# Altium PCB PCB1.PcbDoc (part 2 of 2)
Units mil, origin at the board's own origin, x right, y up, seen from the top; angles counter-clockwise.
Board outline 1945 x 1820 mil, 2 copper layers (Top Layer, Bottom Layer); 144 components, 11 nets, 468 pads, 0 vias.
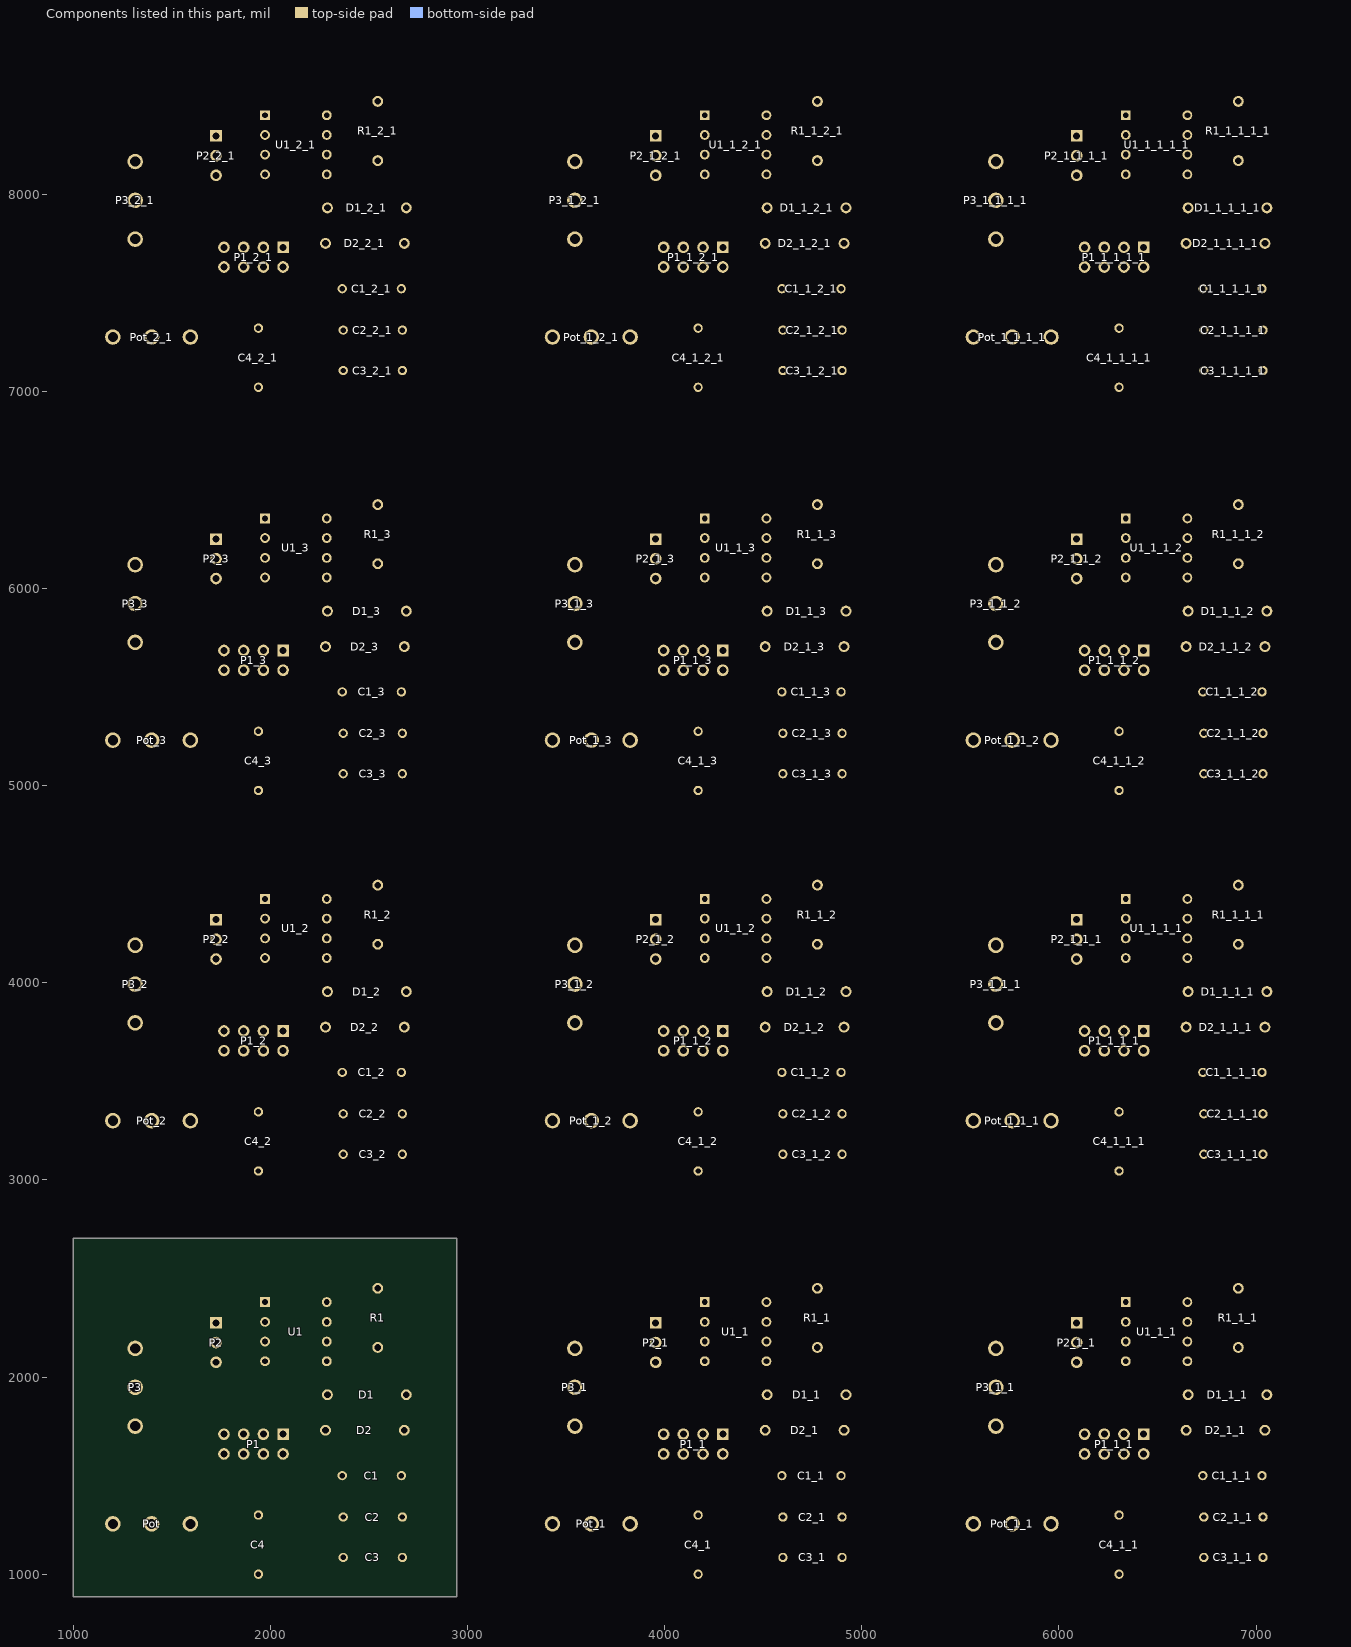
[diagram p2: the components of this part, seen from the top]

## Nets (pads, with @x,y where several pads share a name; then routed paths per layer and width w, separated by ;. In a path a pad name is that pad's centre, name@x,y a point inside that pad or via, vN(x,y) a via of type N, cw(c..) or ccw(c..) an arc to the next point about the centre after c; other vN are vias at no path point) (continued)
copper on no net: | length 190773.3
  Bottom Layer w45: 1201.3,3300 1194.84,3306.46 1148.54,3306.46 1100,3355 1100,3903.15 1190,3993.15 1315,3993.15 1536.85,4215 1540,4215 1545,4220 1725,4220 1967.37,4220 1972.37,4225 1973.7,4225 ; 1201.3,5230 1194.84,5236.46 1148.54,5236.46 1100,5285 1100,5833.15 1190,5923.15 1315,5923.15 1536.85,6145 1540,6145 1545,6150 1725,6150 1967.37,6150 1972.37,6155 1973.7,6155 ; 1201.3,7275 1194.84,7281.46 1148.54,7281.46 1100,7330 1100,7878.15 1190,7968.15 1315,7968.15 1536.85,8190 1540,8190 1545,8195 1725,8195 1967.37,8195 1972.37,8200 1973.7,8200 ; 1315,3796.3 1636.01,4117.31 1722.31,4117.31 1725,4120 1967.37,4120 1972.37,4125 1973.7,4125 2042.25,4125 2165,4247.75 2165,4380 2209.06,4424.06 2285.36,4424.06 2286.3,4425 2287.24,4425.94 2380.94,4425.94 2450,4495 2545,4495 ; 1315,4190 1445,4320 1725,4320 1830,4425 1973.7,4425 1973.7,4605.06 2053.64,4685 2640,4685 2800,4525 2800,3095 2683.88,2978.88 1846.36,2978.88 1775,3050.24 1775,3370 1692.97,3452.03 1692.97,3684.83 1763.14,3755 1765,3755 1865,3755 1965,3755 2065,3755 ; 1315,5726.3 1636.01,6047.31 1722.31,6047.31 1725,6050 1967.37,6050 1972.37,6055 1973.7,6055 2042.25,6055 2165,6177.75 2165,6310 2209.06,6354.06 2285.36,6354.06 2286.3,6355 2287.24,6355.94 2380.94,6355.94 2450,6425 2545,6425 ; 1315,6120 1445,6250 1725,6250 1830,6355 1973.7,6355 1973.7,6535.06 2053.64,6615 2640,6615 2800,6455 2800,5025 2683.88,4908.88 1846.36,4908.88 1775,4980.24 1775,5300 1692.97,5382.03 1692.97,5614.83 1763.14,5685 1765,5685 1865,5685 1965,5685 2065,5685 ; 1315,7771.3 1636.01,8092.31 1722.31,8092.31 1725,8095 1967.37,8095 1972.37,8100 1973.7,8100 2042.25,8100 2165,8222.75 2165,8355 2209.06,8399.06 2285.36,8399.06 2286.3,8400 2287.24,8400.94 2380.94,8400.94 2450,8470 2545,8470 ; 1315,8165 1445,8295 1725,8295 1830,8400 1973.7,8400 1973.7,8580.06 2053.64,8660 2640,8660 2800,8500 2800,7070 2683.88,6953.88 1846.36,6953.88 1775,7025.24 1775,7345 1692.97,7427.03 1692.97,7659.83 1763.14,7730 1765,7730 1865,7730 1965,7730 2065,7730 ; 1398.15,3300 1398.15,3668.15 1685,3955 2290,3955 ; 1398.15,5230 1398.15,5598.15 1685,5885 2290,5885 ; 1398.15,7275 1398.15,7643.15 1685,7930 2290,7930 ; 1590,3300 1590,3730 1725,3865 2190,3865 2280,3775 ; 1590,5230 1590,5660 1725,5795 2190,5795 2280,5705 ; 1590,7275 1590,7705 1725,7840 2190,7840 2280,7750 ; 1765,3655 1765,3570 1940,3395 1940,3345 ; 1765,5585 1765,5500 1940,5325 1940,5275 ; 1765,7630 1765,7545 1940,7370 1940,7320 ; 1865,3655 1867.69,3652.31 1867.69,3577.31 2315,3130 2370,3130 ; 1865,5585 1867.69,5582.31 1867.69,5507.31 2315,5060 2370,5060 ; 1865,7630 1867.69,7627.31 1867.69,7552.31 2315,7105 2370,7105 ; 1940,3045 1950,3055 2615,3055 2670,3110 2670,3130 2670,3335 2670,3539.39 2665,3544.39 2665,3545 2665,3930 2688.06,3953.06 ; 1940,4975 1950,4985 2615,4985 2670,5040 2670,5060 2670,5265 2670,5469.39 2665,5474.39 2665,5475 2665,5860 2688.06,5883.06 ; 1940,7020 1950,7030 2615,7030 2670,7085 2670,7105 2670,7310 2670,7514.39 2665,7519.39 2665,7520 2665,7905 2688.06,7928.06 ; 1965,3655 1965,3605 2234.57,3335.43 2369.57,3335.43 2370,3335 ; 1965,5585 1965,5535 2234.57,5265.43 2369.57,5265.43 2370,5265 ; 1965,7630 1965,7580 2234.57,7310.43 2369.57,7310.43 2370,7310 ; 1973.7,4325 1974.64,4325.94 2053.64,4325.94 2080,4352.3 2080,4470 2205,4595 2615,4595 2690,4520 2690,3955 2688.06,3953.06 ; 1973.7,6255 1974.64,6255.94 2053.64,6255.94 2080,6282.3 2080,6400 2205,6525 2615,6525 2690,6450 2690,5885 2688.06,5883.06 ; 1973.7,8300 1974.64,8300.94 2053.64,8300.94 2080,8327.3 2080,8445 2205,8570 2615,8570 2690,8495 2690,7930 2688.06,7928.06 ; 2065,3655 2065,3635 2155,3545 2365,3545 ; 2065,5585 2065,5565 2155,5475 2365,5475 ; 2065,7630 2065,7610 2155,7520 2365,7520 ; 2286.3,4225 2287.24,4224.06 2370.94,4224.06 2645,3950 2648.06,3953.06 2688.06,3953.06 ; 2286.3,4325 2287.24,4325.94 2414.06,4325.94 2545,4195 ; 2286.3,6155 2287.24,6154.06 2370.94,6154.06 2645,5880 2648.06,5883.06 2688.06,5883.06 ; 2286.3,6255 2287.24,6255.94 2414.06,6255.94 2545,6125 ; 2286.3,8200 2287.24,8199.06 2370.94,8199.06 2645,7925 2648.06,7928.06 2688.06,7928.06 ; 2286.3,8300 2287.24,8300.94 2414.06,8300.94 2545,8170 ; 3431.3,1255 3424.84,1261.46 3378.54,1261.46 3330,1310 3330,1858.15 3420,1948.15 3545,1948.15 3766.85,2170 3770,2170 3775,2175 3955,2175 4197.37,2175 4202.37,2180 4203.7,2180 ; 3431.3,3300 3424.84,3306.46 3378.54,3306.46 3330,3355 3330,3903.15 3420,3993.15 3545,3993.15 3766.85,4215 3770,4215 3775,4220 3955,4220 4197.37,4220 4202.37,4225 4203.7,4225 ; 3431.3,5230 3424.84,5236.46 3378.54,5236.46 3330,5285 3330,5833.15 3420,5923.15 3545,5923.15 3766.85,6145 3770,6145 3775,6150 3955,6150 4197.37,6150 4202.37,6155 4203.7,6155 ; 3431.3,7275 3424.84,7281.46 3378.54,7281.46 3330,7330 3330,7878.15 3420,7968.15 3545,7968.15 3766.85,8190 3770,8190 3775,8195 3955,8195 4197.37,8195 4202.37,8200 4203.7,8200 ; 3545,1751.3 3866.01,2072.31 3952.31,2072.31 3955,2075 4197.37,2075 4202.37,2080 4203.7,2080 4272.25,2080 4395,2202.75 4395,2335 4439.06,2379.06 4515.36,2379.06 4516.3,2380 4517.24,2380.94 4610.94,2380.94 4680,2450 4775,2450 ; 3545,2145 3675,2275 3955,2275 4060,2380 4203.7,2380 4203.7,2560.06 4283.64,2640 4870,2640 5030,2480 5030,1050 4913.88,933.88 4076.36,933.88 4005,1005.24 4005,1325 3922.97,1407.03 3922.97,1639.83 3993.14,1710 3995,1710 4095,1710 4195,1710 4295,1710 ; 3545,3796.3 3866.01,4117.31 3952.31,4117.31 3955,4120 4197.37,4120 4202.37,4125 4203.7,4125 4272.25,4125 4395,4247.75 4395,4380 4439.06,4424.06 4515.36,4424.06 4516.3,4425 4517.24,4425.94 4610.94,4425.94 4680,4495 4775,4495 ; 3545,4190 3675,4320 3955,4320 4060,4425 4203.7,4425 4203.7,4605.06 4283.64,4685 4870,4685 5030,4525 5030,3095 4913.88,2978.88 4076.36,2978.88 4005,3050.24 4005,3370 3922.97,3452.03 3922.97,3684.83 3993.14,3755 3995,3755 4095,3755 4195,3755 4295,3755 ; 3545,5726.3 3866.01,6047.31 3952.31,6047.31 3955,6050 4197.37,6050 4202.37,6055 4203.7,6055 4272.25,6055 4395,6177.75 4395,6310 4439.06,6354.06 4515.36,6354.06 4516.3,6355 4517.24,6355.94 4610.94,6355.94 4680,6425 4775,6425 ; 3545,6120 3675,6250 3955,6250 4060,6355 4203.7,6355 4203.7,6535.06 4283.64,6615 4870,6615 5030,6455 5030,5025 4913.88,4908.88 4076.36,4908.88 4005,4980.24 4005,5300 3922.97,5382.03 3922.97,5614.83 3993.14,5685 3995,5685 4095,5685 4195,5685 4295,5685 ; 3545,7771.3 3866.01,8092.31 3952.31,8092.31 3955,8095 4197.37,8095 4202.37,8100 4203.7,8100 4272.25,8100 4395,8222.75 4395,8355 4439.06,8399.06 4515.36,8399.06 4516.3,8400 4517.24,8400.94 4610.94,8400.94 4680,8470 4775,8470 ; 3545,8165 3675,8295 3955,8295 4060,8400 4203.7,8400 4203.7,8580.06 4283.64,8660 4870,8660 5030,8500 5030,7070 4913.88,6953.88 4076.36,6953.88 4005,7025.24 4005,7345 3922.97,7427.03 3922.97,7659.83 3993.14,7730 3995,7730 4095,7730 4195,7730 4295,7730 ; 3628.15,1255 3628.15,1623.15 3915,1910 4520,1910 ; 3628.15,3300 3628.15,3668.15 3915,3955 4520,3955 ; 3628.15,5230 3628.15,5598.15 3915,5885 4520,5885 ; 3628.15,7275 3628.15,7643.15 3915,7930 4520,7930 ; 3820,1255 3820,1685 3955,1820 4420,1820 4510,1730 ; 3820,3300 3820,3730 3955,3865 4420,3865 4510,3775 ; 3820,5230 3820,5660 3955,5795 4420,5795 4510,5705 ; 3820,7275 3820,7705 3955,7840 4420,7840 4510,7750 ; 3995,1610 3995,1525 4170,1350 4170,1300 ; 3995,3655 3995,3570 4170,3395 4170,3345 ; 3995,5585 3995,5500 4170,5325 4170,5275 ; 3995,7630 3995,7545 4170,7370 4170,7320 ; 4095,1610 4097.69,1607.31 4097.69,1532.31 4545,1085 4600,1085 ; 4095,3655 4097.69,3652.31 4097.69,3577.31 4545,3130 4600,3130 ; 4095,5585 4097.69,5582.31 4097.69,5507.31 4545,5060 4600,5060 ; 4095,7630 4097.69,7627.31 4097.69,7552.31 4545,7105 4600,7105 ; 4170,1000 4180,1010 4845,1010 4900,1065 4900,1085 4900,1290 4900,1494.39 4895,1499.39 4895,1500 4895,1885 4918.06,1908.06 ; 4170,3045 4180,3055 4845,3055 4900,3110 4900,3130 4900,3335 4900,3539.39 4895,3544.39 4895,3545 4895,3930 4918.06,3953.06 ; 4170,4975 4180,4985 4845,4985 4900,5040 4900,5060 4900,5265 4900,5469.39 4895,5474.39 4895,5475 4895,5860 4918.06,5883.06 ; 4170,7020 4180,7030 4845,7030 4900,7085 4900,7105 4900,7310 4900,7514.39 4895,7519.39 4895,7520 4895,7905 4918.06,7928.06 ; 4195,1610 4195,1560 4464.57,1290.43 4599.57,1290.43 4600,1290 ; 4195,3655 4195,3605 4464.57,3335.43 4599.57,3335.43 4600,3335 ; 4195,5585 4195,5535 4464.57,5265.43 4599.57,5265.43 4600,5265 ; 4195,7630 4195,7580 4464.57,7310.43 4599.57,7310.43 4600,7310 ; 4203.7,2280 4204.64,2280.94 4283.64,2280.94 4310,2307.3 4310,2425 4435,2550 4845,2550 4920,2475 4920,1910 4918.06,1908.06 ; 4203.7,4325 4204.64,4325.94 4283.64,4325.94 4310,4352.3 4310,4470 4435,4595 4845,4595 4920,4520 4920,3955 4918.06,3953.06 ; 4203.7,6255 4204.64,6255.94 4283.64,6255.94 4310,6282.3 4310,6400 4435,6525 4845,6525 4920,6450 4920,5885 4918.06,5883.06 ; 4203.7,8300 4204.64,8300.94 4283.64,8300.94 4310,8327.3 4310,8445 4435,8570 4845,8570 4920,8495 4920,7930 4918.06,7928.06 ; 4295,1610 4295,1590 4385,1500 4595,1500 ; 4295,3655 4295,3635 4385,3545 4595,3545 ; 4295,5585 4295,5565 4385,5475 4595,5475 ; 4295,7630 4295,7610 4385,7520 4595,7520 ; 4516.3,2180 4517.24,2179.06 4600.94,2179.06 4875,1905 4878.06,1908.06 4918.06,1908.06 ; 4516.3,2280 4517.24,2280.94 4644.06,2280.94 4775,2150 ; 4516.3,4225 4517.24,4224.06 4600.94,4224.06 4875,3950 4878.06,3953.06 4918.06,3953.06 ; 4516.3,4325 4517.24,4325.94 4644.06,4325.94 4775,4195 ; 4516.3,6155 4517.24,6154.06 4600.94,6154.06 4875,5880 4878.06,5883.06 4918.06,5883.06 ; 4516.3,6255 4517.24,6255.94 4644.06,6255.94 4775,6125 ; 4516.3,8200 4517.24,8199.06 4600.94,8199.06 4875,7925 4878.06,7928.06 4918.06,7928.06 ; 4516.3,8300 4517.24,8300.94 4644.06,8300.94 4775,8170 ; 5566.3,1255 5559.84,1261.46 5513.54,1261.46 5465,1310 5465,1858.15 5555,1948.15 5680,1948.15 5901.85,2170 5905,2170 5910,2175 6090,2175 6332.37,2175 6337.37,2180 6338.7,2180 ; 5566.3,3300 5559.84,3306.46 5513.54,3306.46 5465,3355 5465,3903.15 5555,3993.15 5680,3993.15 5901.85,4215 5905,4215 5910,4220 6090,4220 6332.37,4220 6337.37,4225 6338.7,4225 ; 5566.3,5230 5559.84,5236.46 5513.54,5236.46 5465,5285 5465,5833.15 5555,5923.15 5680,5923.15 5901.85,6145 5905,6145 5910,6150 6090,6150 6332.37,6150 6337.37,6155 6338.7,6155 ; 5566.3,7275 5559.84,7281.46 5513.54,7281.46 5465,7330 5465,7878.15 5555,7968.15 5680,7968.15 5901.85,8190 5905,8190 5910,8195 6090,8195 6332.37,8195 6337.37,8200 6338.7,8200 ; 5680,1751.3 6001.01,2072.31 6087.31,2072.31 6090,2075 6332.37,2075 6337.37,2080 6338.7,2080 6407.25,2080 6530,2202.75 6530,2335 6574.06,2379.06 6650.36,2379.06 6651.3,2380 6652.24,2380.94 6745.94,2380.94 6815,2450 6910,2450 ; 5680,2145 5810,2275 6090,2275 6195,2380 6338.7,2380 6338.7,2560.06 6418.64,2640 7005,2640 7165,2480 7165,1050 7048.88,933.88 6211.36,933.88 6140,1005.24 6140,1325 6057.97,1407.03 6057.97,1639.83 6128.14,1710 6130,1710 6230,1710 6330,1710 6430,1710 ; 5680,3796.3 6001.01,4117.31 6087.31,4117.31 6090,4120 6332.37,4120 6337.37,4125 6338.7,4125 6407.25,4125 6530,4247.75 6530,4380 6574.06,4424.06 6650.36,4424.06 6651.3,4425 6652.24,4425.94 6745.94,4425.94 6815,4495 6910,4495 ; 5680,4190 5810,4320 6090,4320 6195,4425 6338.7,4425 6338.7,4605.06 6418.64,4685 7005,4685 7165,4525 7165,3095 7048.88,2978.88 6211.36,2978.88 6140,3050.24 6140,3370 6057.97,3452.03 6057.97,3684.83 6128.14,3755 6130,3755 6230,3755 6330,3755 6430,3755 ; 5680,5726.3 6001.01,6047.31 6087.31,6047.31 6090,6050 6332.37,6050 6337.37,6055 6338.7,6055 6407.25,6055 6530,6177.75 6530,6310 6574.06,6354.06 6650.36,6354.06 6651.3,6355 6652.24,6355.94 6745.94,6355.94 6815,6425 6910,6425 ; 5680,6120 5810,6250 6090,6250 6195,6355 6338.7,6355 6338.7,6535.06 6418.64,6615 7005,6615 7165,6455 7165,5025 7048.88,4908.88 6211.36,4908.88 6140,4980.24 6140,5300 6057.97,5382.03 6057.97,5614.83 6128.14,5685 6130,5685 6230,5685 6330,5685 6430,5685 ; 5680,7771.3 6001.01,8092.31 6087.31,8092.31 6090,8095 6332.37,8095 6337.37,8100 6338.7,8100 6407.25,8100 6530,8222.75 6530,8355 6574.06,8399.06 6650.36,8399.06 6651.3,8400 6652.24,8400.94 6745.94,8400.94 6815,8470 6910,8470 ; 5680,8165 5810,8295 6090,8295 6195,8400 6338.7,8400 6338.7,8580.06 6418.64,8660 7005,8660 7165,8500 7165,7070 7048.88,6953.88 6211.36,6953.88 6140,7025.24 6140,7345 6057.97,7427.03 6057.97,7659.83 6128.14,7730 6130,7730 6230,7730 6330,7730 6430,7730 ; 5763.15,1255 5763.15,1623.15 6050,1910 6655,1910 ; 5763.15,3300 5763.15,3668.15 6050,3955 6655,3955 ; 5763.15,5230 5763.15,5598.15 6050,5885 6655,5885 ; 5763.15,7275 5763.15,7643.15 6050,7930 6655,7930 ; 5955,1255 5955,1685 6090,1820 6555,1820 6645,1730 ; 5955,3300 5955,3730 6090,3865 6555,3865 6645,3775 ; 5955,5230 5955,5660 6090,5795 6555,5795 6645,5705 ; 5955,7275 5955,7705 6090,7840 6555,7840 6645,7750 ; 6130,1610 6130,1525 6305,1350 6305,1300 ; 6130,3655 6130,3570 6305,3395 6305,3345 ; 6130,5585 6130,5500 6305,5325 6305,5275 ; 6130,7630 6130,7545 6305,7370 6305,7320 ; 6230,1610 6232.69,1607.31 6232.69,1532.31 6680,1085 6735,1085 ; 6230,3655 6232.69,3652.31 6232.69,3577.31 6680,3130 6735,3130 ; 6230,5585 6232.69,5582.31 6232.69,5507.31 6680,5060 6735,5060 ; 6230,7630 6232.69,7627.31 6232.69,7552.31 6680,7105 6735,7105 ; 6305,1000 6315,1010 6980,1010 7035,1065 7035,1085 7035,1290 7035,1494.39 7030,1499.39 7030,1500 7030,1885 7053.06,1908.06 ; 6305,3045 6315,3055 6980,3055 7035,3110 7035,3130 7035,3335 7035,3539.39 7030,3544.39 7030,3545 7030,3930 7053.06,3953.06 ; 6305,4975 6315,4985 6980,4985 7035,5040 7035,5060 7035,5265 7035,5469.39 7030,5474.39 7030,5475 7030,5860 7053.06,5883.06 ; 6305,7020 6315,7030 6980,7030 7035,7085 7035,7105 7035,7310 7035,7514.39 7030,7519.39 7030,7520 7030,7905 7053.06,7928.06 ; 6330,1610 6330,1560 6599.57,1290.43 6734.57,1290.43 6735,1290 ; 6330,3655 6330,3605 6599.57,3335.43 6734.57,3335.43 6735,3335 ; 6330,5585 6330,5535 6599.57,5265.43 6734.57,5265.43 6735,5265 ; 6330,7630 6330,7580 6599.57,7310.43 6734.57,7310.43 6735,7310 ; 6338.7,2280 6339.64,2280.94 6418.64,2280.94 6445,2307.3 6445,2425 6570,2550 6980,2550 7055,2475 7055,1910 7053.06,1908.06 ; 6338.7,4325 6339.64,4325.94 6418.64,4325.94 6445,4352.3 6445,4470 6570,4595 6980,4595 7055,4520 7055,3955 7053.06,3953.06 ; 6338.7,6255 6339.64,6255.94 6418.64,6255.94 6445,6282.3 6445,6400 6570,6525 6980,6525 7055,6450 7055,5885 7053.06,5883.06 ; 6338.7,8300 6339.64,8300.94 6418.64,8300.94 6445,8327.3 6445,8445 6570,8570 6980,8570 7055,8495 7055,7930 7053.06,7928.06 ; 6430,1610 6430,1590 6520,1500 6730,1500 ; 6430,3655 6430,3635 6520,3545 6730,3545 ; 6430,5585 6430,5565 6520,5475 6730,5475 ; 6430,7630 6430,7610 6520,7520 6730,7520 ; 6651.3,2180 6652.24,2179.06 6735.94,2179.06 7010,1905 7013.06,1908.06 7053.06,1908.06 ; 6651.3,2280 6652.24,2280.94 6779.06,2280.94 6910,2150 ; 6651.3,4225 6652.24,4224.06 6735.94,4224.06 7010,3950 7013.06,3953.06 7053.06,3953.06 ; 6651.3,4325 6652.24,4325.94 6779.06,4325.94 6910,4195 ; 6651.3,6155 6652.24,6154.06 6735.94,6154.06 7010,5880 7013.06,5883.06 7053.06,5883.06 ; 6651.3,6255 6652.24,6255.94 6779.06,6255.94 6910,6125 ; 6651.3,8200 6652.24,8199.06 6735.94,8199.06 7010,7925 7013.06,7928.06 7053.06,7928.06 ; 6651.3,8300 6652.24,8300.94 6779.06,8300.94 6910,8170

## Polygon pours and split planes (outlines as drawn)
no net on Bottom Layer "NONET_L02_P076" (solid, remove dead copper, pour order 76): 2587.48,5953.24 2702.71,5886.35 2697.12,5635.67 2690.77,5626.16
no net on Bottom Layer "NONET_L02_P074" (solid, remove dead copper, pour order 74): 2690,5835 2690,6070 2673.4,6070 2564.2,5960.8
no net on Bottom Layer "NONET_L02_P072" (solid, remove dead copper, pour order 72): 1000,6680 1000,4860 2940,4860 2945,4865 2945,6680
no net on Bottom Layer "NONET_L02_P070" (solid, remove dead copper, pour order 70): 3230,6680 3230,4860 5170,4860 5175,4865 5175,6680
no net on Bottom Layer "NONET_L02_P068" (solid, remove dead copper, pour order 68): 4920,5835 4920,6070 4903.4,6070 4794.2,5960.8
no net on Bottom Layer "NONET_L02_P066" (solid, remove dead copper, pour order 66): 4817.48,5953.24 4932.71,5886.35 4927.12,5635.67 4920.77,5626.16
no net on Bottom Layer "NONET_L02_P064" (solid, remove dead copper, pour order 64): 6952.48,5953.24 7067.71,5886.35 7062.12,5635.67 7055.77,5626.16
no net on Bottom Layer "NONET_L02_P062" (solid, remove dead copper, pour order 62): 7055,5835 7055,6070 7038.4,6070 6929.2,5960.8
no net on Bottom Layer "NONET_L02_P060" (solid, remove dead copper, pour order 60): 5365,6680 5365,4860 7305,4860 7310,4865 7310,6680
no net on Bottom Layer "NONET_L02_P058" (solid, remove dead copper, pour order 58): 5365,8725 5365,6905 7305,6905 7310,6910 7310,8725
no net on Bottom Layer "NONET_L02_P056" (solid, remove dead copper, pour order 56): 7055,7880 7055,8115 7038.4,8115 6929.2,8005.8
no net on Bottom Layer "NONET_L02_P054" (solid, remove dead copper, pour order 54): 6952.48,7998.24 7067.71,7931.35 7062.12,7680.67 7055.77,7671.16
no net on Bottom Layer "NONET_L02_P052" (solid, remove dead copper, pour order 52): 4817.48,7998.24 4932.71,7931.35 4927.12,7680.67 4920.77,7671.16
no net on Bottom Layer "NONET_L02_P050" (solid, remove dead copper, pour order 50): 4920,7880 4920,8115 4903.4,8115 4794.2,8005.8
no net on Bottom Layer "NONET_L02_P048" (solid, remove dead copper, pour order 48): 3230,8725 3230,6905 5170,6905 5175,6910 5175,8725
no net on Bottom Layer "NONET_L02_P046" (solid, remove dead copper, pour order 46): 1000,8725 1000,6905 2940,6905 2945,6910 2945,8725
no net on Bottom Layer "NONET_L02_P044" (solid, remove dead copper, pour order 44): 2690,7880 2690,8115 2673.4,8115 2564.2,8005.8
no net on Bottom Layer "NONET_L02_P042" (solid, remove dead copper, pour order 42): 2587.48,7998.24 2702.71,7931.35 2697.12,7680.67 2690.77,7671.16
no net on Bottom Layer "NONET_L02_P040" (solid, remove dead copper, pour order 40): 2587.48,4023.24 2702.71,3956.35 2697.12,3705.67 2690.77,3696.16
no net on Bottom Layer "NONET_L02_P038" (solid, remove dead copper, pour order 38): 2690,3905 2690,4140 2673.4,4140 2564.2,4030.8
no net on Bottom Layer "NONET_L02_P036" (solid, remove dead copper, pour order 36): 1000,4750 1000,2930 2940,2930 2945,2935 2945,4750
no net on Bottom Layer "NONET_L02_P034" (solid, remove dead copper, pour order 34): 3230,4750 3230,2930 5170,2930 5175,2935 5175,4750
no net on Bottom Layer "NONET_L02_P032" (solid, remove dead copper, pour order 32): 4920,3905 4920,4140 4903.4,4140 4794.2,4030.8
no net on Bottom Layer "NONET_L02_P030" (solid, remove dead copper, pour order 30): 4817.48,4023.24 4932.71,3956.35 4927.12,3705.67 4920.77,3696.16
no net on Bottom Layer "NONET_L02_P028" (solid, remove dead copper, pour order 28): 6952.48,4023.24 7067.71,3956.35 7062.12,3705.67 7055.77,3696.16
no net on Bottom Layer "NONET_L02_P026" (solid, remove dead copper, pour order 26): 7055,3905 7055,4140 7038.4,4140 6929.2,4030.8
no net on Bottom Layer "NONET_L02_P024" (solid, remove dead copper, pour order 24): 5365,4750 5365,2930 7305,2930 7310,2935 7310,4750
no net on Bottom Layer "NONET_L02_P022" (solid, remove dead copper, pour order 22): 5365,2705 5365,885 7305,885 7310,890 7310,2705
no net on Bottom Layer "NONET_L02_P020" (solid, remove dead copper, pour order 20): 7055,1860 7055,2095 7038.4,2095 6929.2,1985.8
no net on Bottom Layer "NONET_L02_P018" (solid, remove dead copper, pour order 18): 6952.48,1978.24 7067.71,1911.35 7062.12,1660.67 7055.77,1651.16
no net on Bottom Layer "NONET_L02_P016" (solid, remove dead copper, pour order 16): 4817.48,1978.24 4932.71,1911.35 4927.12,1660.67 4920.77,1651.16
no net on Bottom Layer "NONET_L02_P014" (solid, remove dead copper, pour order 14): 4920,1860 4920,2095 4903.4,2095 4794.2,1985.8
no net on Bottom Layer "NONET_L02_P012" (solid, remove dead copper, pour order 12): 3230,2705 3230,885 5170,885 5175,890 5175,2705
GND on Bottom Layer "GND_L02_P010" (solid, remove dead copper, pour order 10): 1000,2705 1000,885 2940,885 2945,890 2945,2705
NetC1_2 on Bottom Layer "NETC1_2_L02_P008" (solid, remove dead copper, pour order 8): 2690,1860 2690,2095 2673.4,2095 2564.2,1985.8
NetC1_2 on Bottom Layer "NETC1_2_L02_P006" (solid, remove dead copper, pour order 6): 2587.48,1978.24 2702.71,1911.35 2697.12,1660.67 2690.77,1651.16
no net on Bottom Layer "Bottom Layer-No Net" (solid, pour order 2): 2690,2010

## Keep-outs
Keep-Out Layer:
  lines w10: 1000,885 1000,2705 2945,2705 2945,885 1000,885 ; 1000,2930 2945,2930 2945,4750 1000,4750 1000,2930 ; 1000,4860 2945,4860 2945,6680 1000,6680 1000,4860 ; 1000,6905 1000,8725 2945,8725 2945,6905 1000,6905 ; 3230,885 5175,885 5175,2705 3230,2705 3230,885 ; 3230,2930 3230,4750 5175,4750 5175,2930 3230,2930 ; 3230,4860 3230,6680 5175,6680 5175,4860 3230,4860 ; 3230,6905 5175,6905 5175,8725 3230,8725 3230,6905 ; 5365,885 5365,2705 7310,2705 7310,885 5365,885 ; 5365,2930 7310,2930 7310,4750 5365,4750 5365,2930 ; 5365,4860 7310,4860 7310,6680 5365,6680 5365,4860 ; 5365,6905 5365,8725 7310,8725 7310,6905 5365,6905

## Other copper
Bottom Layer:
  text "Const Freq" at 1850,8595 h60
  text "Const Freq" at 4080,8595 h60
  text "Const Freq" at 6215,8595 h60
  text "V 01" at 1305,8445 h60
  text "V 01" at 3535,8445 h60
  text "V 01" at 5670,8445 h60
  text "Const Freq" at 1850,6550 h60
  text "Const Freq" at 4080,6550 h60
  text "Const Freq" at 6215,6550 h60
  text "V 01" at 1305,6400 h60
  text "V 01" at 3535,6400 h60
  text "V 01" at 5670,6400 h60
  text "Const Freq" at 1850,4620 h60
  text "Const Freq" at 4080,4620 h60
  text "Const Freq" at 6215,4620 h60
  text "V 01" at 1305,4470 h60
  text "V 01" at 3535,4470 h60
  text "V 01" at 5670,4470 h60
  text "Const Freq" at 1850,2575 h60
  text "Const Freq" at 4080,2575 h60
  text "Const Freq" at 6215,2575 h60
  text "V 01" at 1305,2425 h60
  text "V 01" at 3535,2425 h60
  text "V 01" at 5670,2425 h60

## Silkscreen, mask and mechanical layers (free items; w line width, h text height)
Top Overlay:
  text "By Wesley" at 1240,8505 h60
  text "By Wesley" at 3470,8505 h60
  text "By Wesley" at 5605,8505 h60
  text "GND" at 1235,8315 h60
  text "GND" at 3465,8315 h60
  text "GND" at 5600,8315 h60
  text "Out" at 1625,7940 h60
  text "Out" at 3855,7940 h60
  text "Out" at 5990,7940 h60
  text "Vcc" at 1235,7570 h60
  text "Vcc" at 3465,7570 h60
  text "Vcc" at 5600,7570 h60
  text "By Wesley" at 1240,6460 h60
  text "By Wesley" at 3470,6460 h60
  text "By Wesley" at 5605,6460 h60
  text "GND" at 1235,6270 h60
  text "GND" at 3465,6270 h60
  text "GND" at 5600,6270 h60
  text "Out" at 1625,5895 h60
  text "Out" at 3855,5895 h60
  text "Out" at 5990,5895 h60
  text "Vcc" at 1235,5525 h60
  text "Vcc" at 3465,5525 h60
  text "Vcc" at 5600,5525 h60
  text "By Wesley" at 1240,4530 h60
  text "By Wesley" at 3470,4530 h60
  text "By Wesley" at 5605,4530 h60
  text "GND" at 1235,4340 h60
  text "GND" at 3465,4340 h60
  text "GND" at 5600,4340 h60
  text "Out" at 1625,3965 h60
  text "Out" at 3855,3965 h60
  text "Out" at 5990,3965 h60
  text "Vcc" at 1235,3595 h60
  text "Vcc" at 3465,3595 h60
  text "Vcc" at 5600,3595 h60
  text "By Wesley" at 1240,2485 h60
  text "By Wesley" at 3470,2485 h60
  text "By Wesley" at 5605,2485 h60
  text "GND" at 1235,2295 h60
  text "GND" at 3465,2295 h60
  text "GND" at 5600,2295 h60
  text "Out" at 1625,1920 h60
  text "Out" at 3855,1920 h60
  text "Out" at 5990,1920 h60
  text "Vcc" at 1235,1550 h60
  text "Vcc" at 3465,1550 h60
  text "Vcc" at 5600,1550 h60
Mechanical 1:
  circle w10: c2865,4930 r40.31
  circle w10: c2870,6605 r40.31
  circle w10: c1075,6605 r40.31
  circle w10: c1070,4930 r40.31
  circle w10: c3300,4930 r40.31
  circle w10: c3305,6605 r40.31
  circle w10: c5100,6605 r40.31
  circle w10: c5095,4930 r40.31
  circle w10: c7230,4930 r40.31
  circle w10: c7235,6605 r40.31
  circle w10: c5440,6605 r40.31
  circle w10: c5435,4930 r40.31
  circle w10: c5435,6975 r40.31
  circle w10: c5440,8650 r40.31
  circle w10: c7235,8650 r40.31
  circle w10: c7230,6975 r40.31
  circle w10: c5095,6975 r40.31
  circle w10: c5100,8650 r40.31
  circle w10: c3305,8650 r40.31
  circle w10: c3300,6975 r40.31
  circle w10: c1070,6975 r40.31
  circle w10: c1075,8650 r40.31
  circle w10: c2870,8650 r40.31
  circle w10: c2865,6975 r40.31
  circle w10: c2865,3000 r40.31
  circle w10: c2870,4675 r40.31
  circle w10: c1075,4675 r40.31
  circle w10: c1070,3000 r40.31
  circle w10: c3300,3000 r40.31
  circle w10: c3305,4675 r40.31
  circle w10: c5100,4675 r40.31
  circle w10: c5095,3000 r40.31
  circle w10: c7230,3000 r40.31
  circle w10: c7235,4675 r40.31
  circle w10: c5440,4675 r40.31
  circle w10: c5435,3000 r40.31
  circle w10: c5435,955 r40.31
  circle w10: c5440,2630 r40.31
  circle w10: c7235,2630 r40.31
  circle w10: c7230,955 r40.31
  circle w10: c5095,955 r40.31
  circle w10: c5100,2630 r40.31
  circle w10: c3305,2630 r40.31
  circle w10: c3300,955 r40.31
  circle w10: c1070,955 r40.31
  circle w10: c1075,2630 r40.31
  circle w10: c2870,2630 r40.31
  circle w10: c2865,955 r40.31

## Dimensions
1000,885 to 1000,2705 on Mechanical 1
1000,885 to 2945,885 on Mechanical 1